# Altium PCB Odrive_input.PcbDoc
Units mm, origin at the board's own origin, x right, y up, seen from the top; angles counter-clockwise.
Board outline 50 x 24 mm, 2 copper layers (Top Layer, Bottom Layer), stack 1.571 mm thick; 3 components, 8 nets, 28 pads, 13 vias.
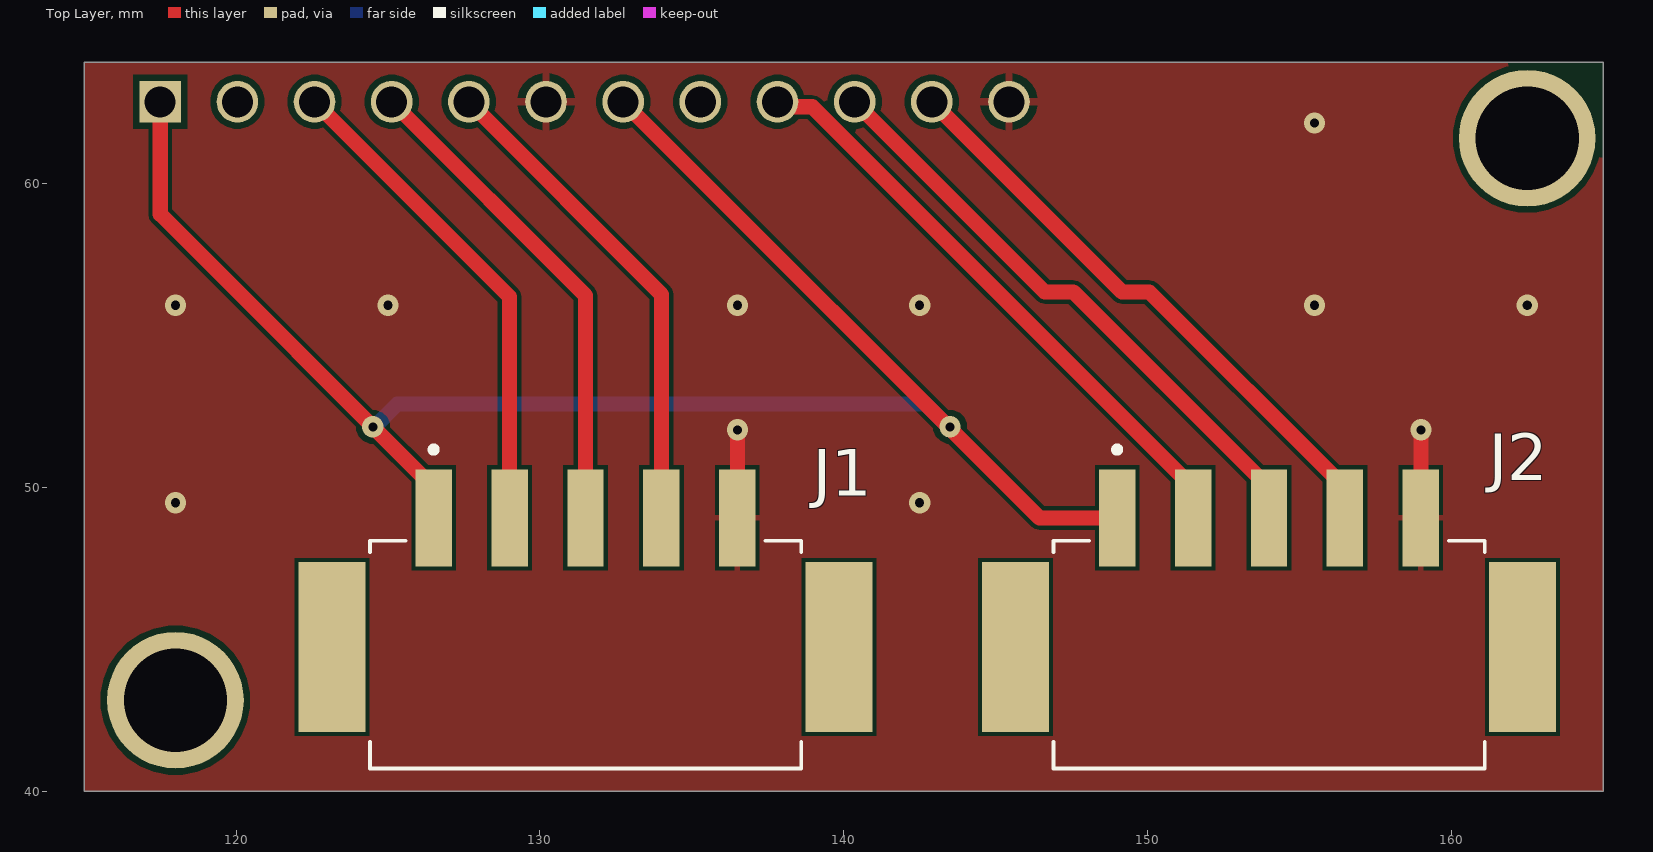
[diagram p0: Top Layer view]
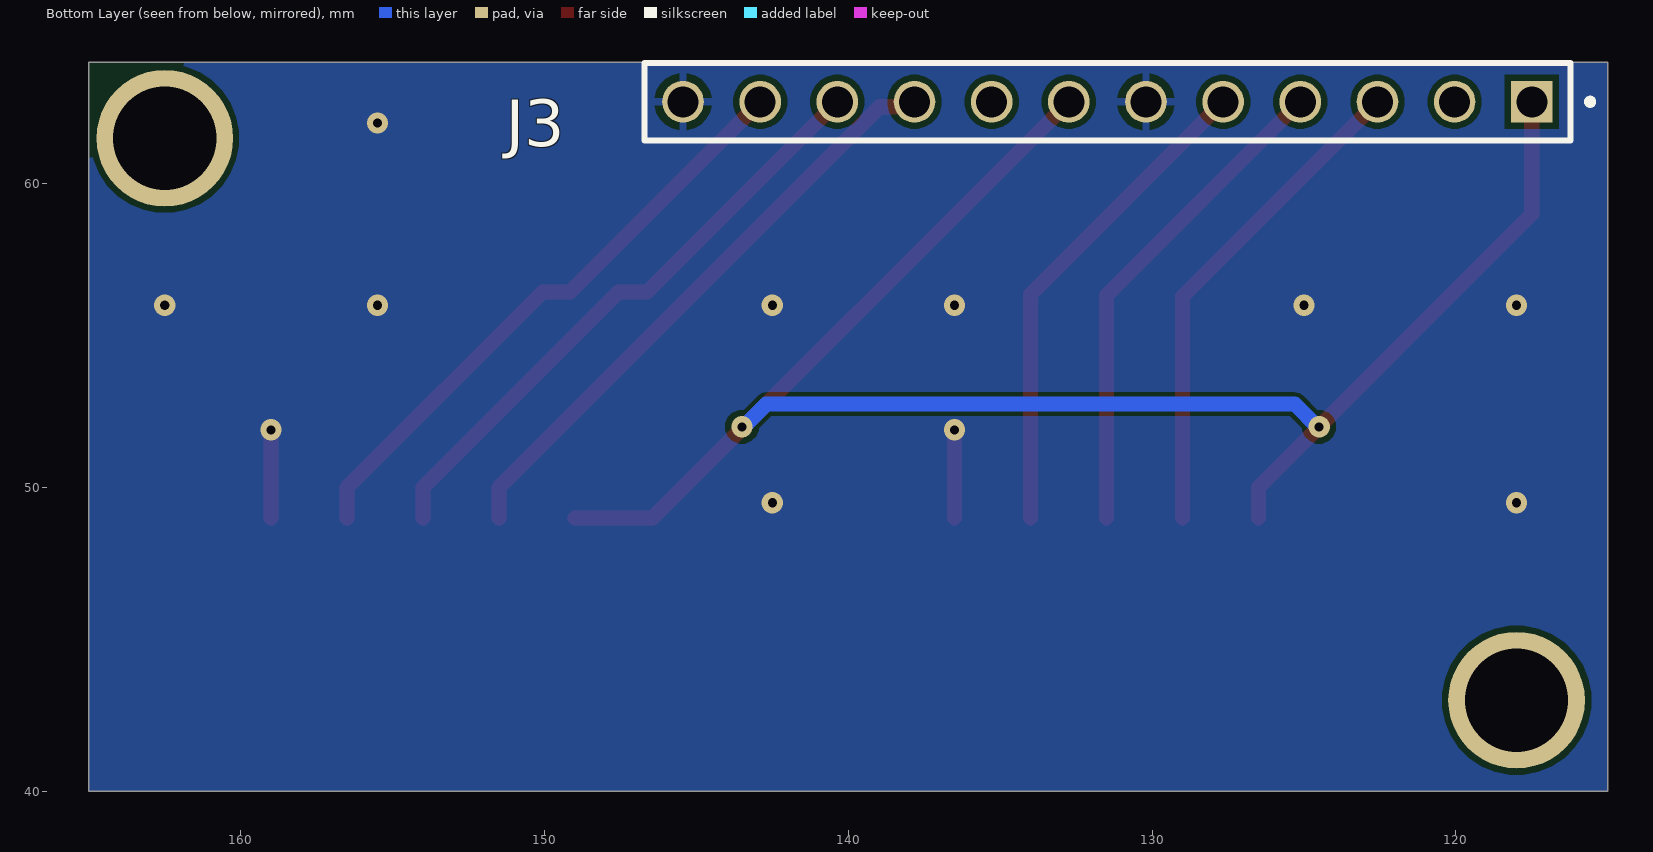
[diagram p1: Bottom Layer view, seen from below]

## Layer stack, top to bottom
Top Solder: solder mask 0.0102, Solder Resist, Dk 3.5
Top Layer: signal copper 0.0356
Dielectric 1: dielectric 1.5, FR-4, Dk 4.8
Bottom Layer: signal copper 0.0356
Bottom Solder: solder mask 0.0102, Solder Resist, Dk 3.5

## Board outline
115,61.23 115,64 116.5,64 148.73,64 165,64 165,40 115,40

## Design rules (kind name [scope] priority, off if disabled: settings)
Clearance Clearance_POWER [(InNet('NetC205_2') OR InNet('NETC203_2') OR InNet('NETC206_2') OR InNet('NetP410_1') OR InNet('NetP410_3') OR InNet('VM'))] p1: gap=0.254 ignorepadtopadclearanceinfootprint=FALSE except(0: SMDPad-Hole THPad-Hole Via-Hole Fill-Hole Poly-Hole Region-Hole Text-Hole; 0.1: Arc-Arc Arc-Track Track-Track; 0.127: Arc-THPad Arc-Fill Arc-Poly Arc-Region Track-THPad Track-Fill Track-Poly Track-Region SMDPad-SMDPad; 0.2: Arc-SMDPad Track-SMDPad; 0.5: THPad-THPad THPad-Fill THPad-Poly THPad-Region Fill-Fill Fill-Poly Fill-Region Poly-Poly Poly-Region Region-Region)
Clearance [All] p2: gap=0.127 ignorepadtopadclearanceinfootprint=FALSE except(0: SMDPad-Hole THPad-Hole Via-Hole Fill-Hole Poly-Hole Region-Hole Text-Hole; 0.1: Arc-Arc Arc-Track Track-Track; 0.2: Arc-SMDPad Track-SMDPad THPad-Poly THPad-Region Via-Fill Via-Poly Via-Region; 0.254: Arc-Via Arc-Text Arc-Hole Track-Via Track-Text Track-Hole SMDPad-THPad SMDPad-Via SMDPad-Text THPad-Via THPad-Text Via-Via Via-Text Fill-Text Poly-Text Region-Text Text-Text; 0.5: THPad-THPad)
ComponentClearance [All] p1: gap=0.127 collisioncheckmode=3 verticalgap=0.254 showdistances=FALSE
HoleSize [All] p1: absolutevalues=TRUE maxlimit=6.5 minlimit=0.025 maxpercent=80.000 minpercent=20.000
MinimumSolderMaskSliver [All] p1: minsoldermaskwidth=0.08
PlaneClearance [All] p1: clearance=0.5
PlaneConnect [All] p1: planeconnectstyle=Direct reliefexpansion=0.508 reliefentries=4 reliefconductorwidth=0.254 reliefairgap=0.254
PolygonConnect PolygonConnect_GND_POWER [InNet('GND') vs (HasFootprint('FP-FC-G-MFG') OR HasFootprint('FP-CL32-IPC_B') OR HasFootprint('TSON Advance_TOS') OR HasFootprint('XT60+MR60') OR HasFootprint('XT-60') OR HasFootprint('FP-SMAJ-CA-MFG') OR InNamedPolygon('NONET_L01_P000'))] p1: connectstyle=Direct reliefconductorwidth=0.254 reliefentries=4 polygonreliefangle="90 Angle" airgapwidth=0.254
PolygonConnect PolygonConnect_GND [InNet('GND')] p2: thpad.connectstyle=Relief thpad.reliefconductorwidth=0.254 thpad.reliefentries=4 thpad.polygonreliefangle="90 Angle" thpad.airgapwidth=0.254 smdpad.connectstyle=Relief smdpad.reliefconductorwidth=0.2 smdpad.reliefentries=4 smdpad.polygonreliefangle="90 Angle" smdpad.airgapwidth=0.127 via.connectstyle=Direct via.reliefconductorwidth=0.254 via.reliefentries=4 via.polygonreliefangle="90 Angle" via.airgapwidth=0.5
PolygonConnect [All] p3: connectstyle=Direct reliefconductorwidth=0.254 reliefentries=4 polygonreliefangle="90 Angle" airgapwidth=0.254
RoutingVias [All] p1: holewidth=0.3 width=0.45 viastyle="Through Hole" minholewidth=0.3 minwidth=0.45 maxholewidth=0.55 maxwidth=0.7
SilkToSilkClearance [All] p1: silktosilkclearance=0
SilkToSolderMaskClearance [IsPad] p1: minsilkscreentomaskgap=0.15 clearancetoexposedcopper=TRUE
SolderMaskExpansion [All] p1: expansion=0.1 istentingtop=FALSE
SupplyNets "Schematic Supply Nets_3" [InNet('3V3')] p1: voltage=0.000
SupplyNets "Schematic Supply Nets" [InNet('GND')] p2: voltage=0.000
Width Width_voltage [InNetClass('Voltage')] p1: maxlimit=0.5 minlimit=0.18 preferedwidth=0.18 minimp=50.000000 maximp=50.000000 favimp=50.000000
Width [All] p2: maxlimit=0.5 minlimit=0.127 preferedwidth=0.18 minimp=50.000000 maximp=50.000000 favimp=50.000000
23 further rules are at their usual default settings.

## Components (designator, comment, footprint, x,y, rotation, side; value= is the part's Value field where it differs from the comment)
J1 "1814948" PHOENIX_1814948 124.4,40.75 r0 top
J2 "1814948" PHOENIX_1814948 146.9,40.75 r0 top
J3 "TSW-112-15-S-S-LL" SAMTEC_TSW-112-15-S-S-LL 117.5,62.7 r0 bottom

## Footprints (in the part's own frame and the unit in brackets; to place one, negate y for a bottom-side part, rotate by r counter-clockwise, add the part's x,y. Pads: shape width x height; smd on the part's side, far side on the other; paste and mask are expansions set on the pad)
PHOENIX_1814948 [mm]
  rect 1.2x3.2 smd: 1(2.1,8.25) 2(4.6,8.25) 3(7.1,8.25) 4(9.6,8.25) 5(12.1,8.25)
  rect 2.2x5.6 smd: SH1(-1.25,4) SH2(15.45,4)
  silkscreen extent 0,0 14.2,10.6
SAMTEC_TSW-112-15-S-S-LL [mm]
  rect 1.37x1.37 hole 1.02: 01(0,0)
  round 1.37 hole 1.02: 02(2.54,0) 03(5.08,0) 04(7.62,0) 05(10.16,0) 06(12.7,0) 07(15.24,0) 08(17.78,0) 09(20.32,0) 10(22.86,0) 11(25.4,0) 12(27.94,0)
  silkscreen extent -2.02,-1.27 29.21,1.27

## Part data
J1 J2: library part CMP-002-00078-1, Case/Package=None, Availability=Unavailable, Component Type=Standard, Design Item ID=1814948, MP=1814948, Pins=5, Price=None, Source=1814948.SchLib
J3: library part CMP-002-00079-1, Case/Package=None, Availability=Unavailable, Component Type=Standard, Design Item ID=TSW-112-15-S-S-LL, MP=TSW-112-15-S-S-LL, Pins=12, Price=None, Source=TSW-112-15-S-S-LL.SchLib

## Free pads (board coordinates)
  round 4.5 hole 3.4: ""(118,43) ""(162.5,61.5)

## Via types
v1: diameter 0.7, hole 0.3, Top Layer to Bottom Layer, 13 vias

## Nets (pads, with @x,y where several pads share a name; then routed paths per layer and width w, separated by ;. In a path a pad name is that pad's centre, name@x,y a point inside that pad or via, vN(x,y) a via of type N, cw(c..) or ccw(c..) an arc to the next point about the centre after c; other vN are vias at no path point)
+5: J1.1 J2.1 J3.01 J3.07 | length 59
  Top Layer w0.5: J3.01 117.5,59 126.5,50 J1.1 ; J3.07@132.7,62.7 J3.07 146.44,49 J2.1
  Bottom Layer w0.5: v1(124.5,52) 124.548,52 125.302,52.754 142.698,52.754 143.452,52 v1(143.5,52)
GND: J1.5 J2.5 J3.06 J3.12 | length 5.8
  Top Layer w0.5: J1.5 v1(136.5,51.9) ; J2.5 v1(159,51.9)
  other v1: 118,49.5 142.5,49.5 118,56 125,56 136.5,56 142.5,56 155.5,56 162.5,56 155.5,62
"M1 ENC A": J1.2 J3.03 | length 16.4
  Top Layer w0.5: J3.03 129,56.28 J1.2
"M1 ENC B": J1.3 J3.04 | length 16.4
  Top Layer w0.5: J3.04@125.1,62.7 J3.04 131.5,56.32 J1.3
"M1 ENC Z": J1.4 J3.05 | length 16.4
  Top Layer w0.5: J3.05@127.6,62.7 J3.05 134,56.36 J1.4
"M2 ENC A": J2.2 J3.09 | length 19.9
  Top Layer w0.5: J3.09 137.986,62.534 138.966,62.534 151.5,50 J2.2
"M2 ENC B": J2.3 J3.10 | length 19.9
  Top Layer w0.5: J3.10 146.618,56.442 147.558,56.442 154,50 J2.3
"M2 ENC Z": J2.4 J3.11 | length 19.9
  Top Layer w0.5: J3.11@142.9,62.6 143.2,62.6 143.184,62.584 143.184,62.416 149.158,56.442 150.058,56.442 156.5,50 J2.4
pads on no net: J1.SH1 J1.SH2 J2.SH1 J2.SH2 J3.02 J3.08

## Polygon pours and split planes (outlines as drawn)
GND on Bottom Layer "GND_L02_P000" (solid, pour order 0): 165,64 165,40 115,40 115,64
GND on Top Layer "GND_L01_P001" (solid, pour order 1): 165,64 165,40 115,40 115,64

## Silkscreen, mask and mechanical layers (free items; w line width, h text height)
Mechanical 1:
  lines w0.254: 115,40 148.73,40 165,40 165,41.77 165,46.76 165,56.74 165,61.73 165,64 148.73,64 116.5,64 115,64 115,61.23 115,40

## Dimensions
117.5,62.7 to 115,64 on Mechanical 1
116.5,64 to 120.04,62.7 on Mechanical 1
165,64 to 117.5,61.8 on Mechanical 1
165,64 to 152.3,62.7 on Mechanical 1
165,46.76 to 158,46 on Mechanical 1
165,46.76 to 118,46.5 on Mechanical 1
116.5,64 to 121.5,43.1 on Mechanical 1
165,64 to 165.5,61.5 on Mechanical 1
165,64 to 162.5,62.5 on Mechanical 1
116.5,64 to 115,40 on Mechanical 1
165,46.76 to 115,40 on Mechanical 1